# EAGLE board StrBrk (EAGLE 7.5.0)
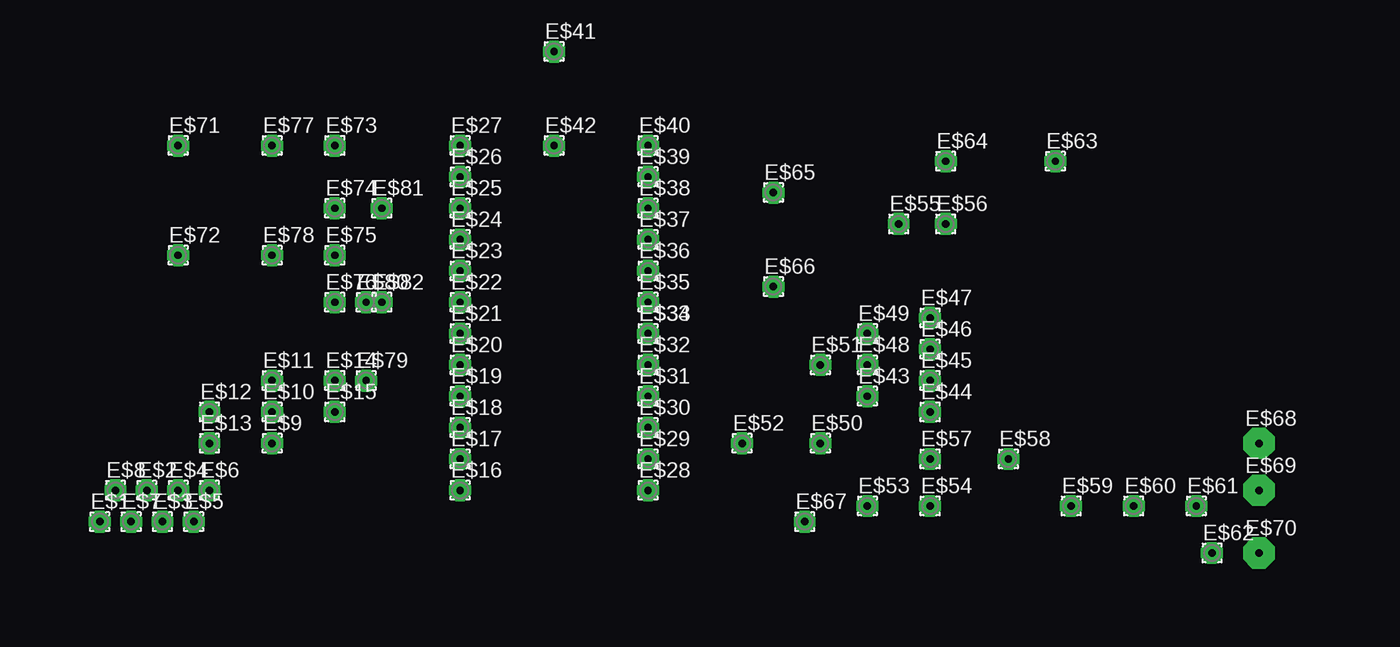
[diagram p0: board, top side]
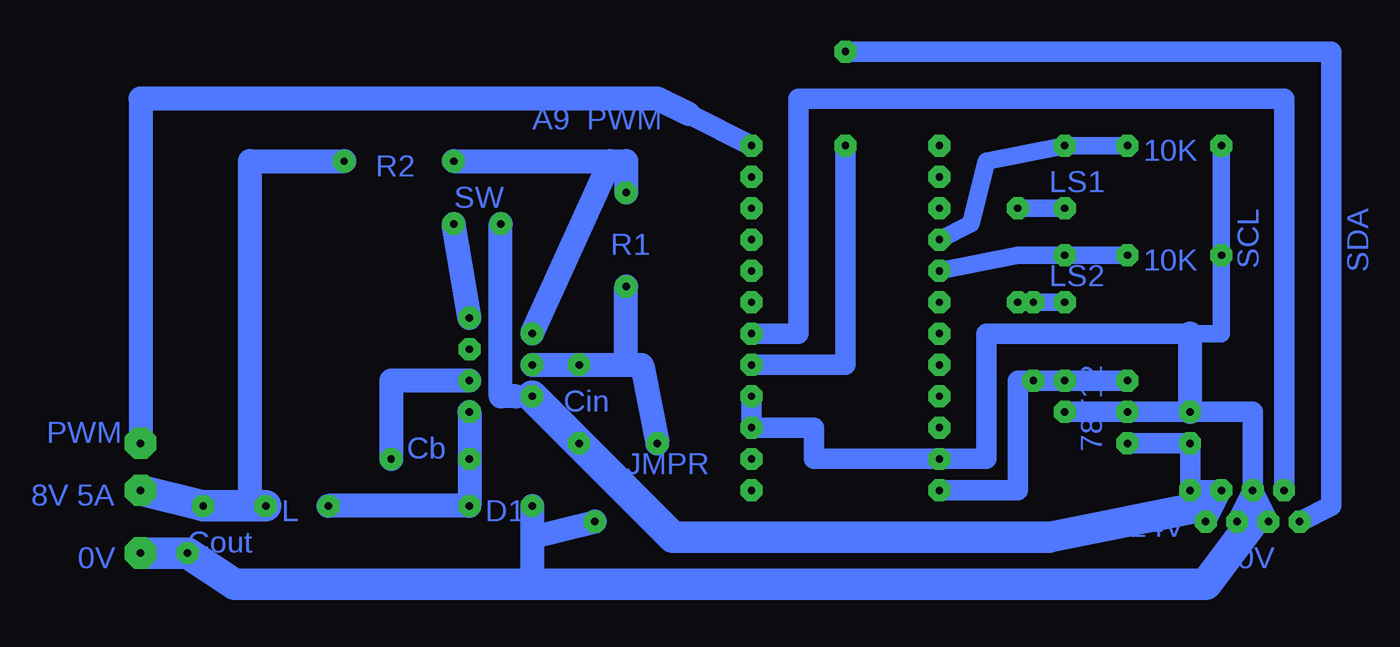
[diagram p1: board, bottom side, seen from below]

No outline drawn. Coordinates in mm, seen from the top.
Copper layers (1*16): Top 0.035mm / dielectric 1.5mm / Bottom 0.035mm
Design rules "default": minimum track width 10mil, minimum drill 24mil, track to track 8mil, track to pad 8mil, pad to pad 8mil, via to via 8mil, smd to smd 8mil, copper to edge 40mil, drill to drill 8mil, minimum pad ring 10mil, minimum via ring 8mil, stop-mask expansion 4mil, vias tented up to drill 0mil, thermal gap 10mil

## Footprints (pad centres in the part's own frame; a part is rotated, then mirrored left to right if it is on the bottom)
1,6/0,8 = drill 0.6 pad 1.778 octagon: 1 0,0
2,15/1,0 = drill 0.6 pad 2.54 octagon: 1 0,0

## Placement (x,y rotation side)
E$1  [1,6/0,8]  7.62,2.54 0 top
E$2  [1,6/0,8]  11.43,5.08 0 top
E$3  [1,6/0,8]  12.7,2.54 0 top
E$4  [1,6/0,8]  13.97,5.08 0 top
E$5  [1,6/0,8]  15.24,2.54 0 top
E$6  [1,6/0,8]  16.51,5.08 0 top
E$7  [1,6/0,8]  10.16,2.54 0 top
E$8  [1,6/0,8]  8.89,5.08 0 top
E$9  [1,6/0,8]  21.59,8.89 0 top
E$10  [1,6/0,8]  21.59,11.43 0 top
E$11  [1,6/0,8]  21.59,13.97 0 top
E$12  [1,6/0,8]  16.51,11.43 0 top
E$13  [1,6/0,8]  16.51,8.89 0 top
E$14  [1,6/0,8]  26.67,13.97 0 top
E$15  [1,6/0,8]  26.67,11.43 0 top
E$16  [1,6/0,8]  36.83,5.08 0 top
E$17  [1,6/0,8]  36.83,7.62 0 top
E$18  [1,6/0,8]  36.83,10.16 0 top
E$19  [1,6/0,8]  36.83,12.7 0 top
E$20  [1,6/0,8]  36.83,15.24 0 top
E$21  [1,6/0,8]  36.83,17.78 0 top
E$22  [1,6/0,8]  36.83,20.32 0 top
E$23  [1,6/0,8]  36.83,22.86 0 top
E$24  [1,6/0,8]  36.83,25.4 0 top
E$25  [1,6/0,8]  36.83,27.94 0 top
E$26  [1,6/0,8]  36.83,30.48 0 top
E$27  [1,6/0,8]  36.83,33.02 0 top
E$28  [1,6/0,8]  52.07,5.08 0 top
E$29  [1,6/0,8]  52.07,7.62 0 top
E$30  [1,6/0,8]  52.07,10.16 0 top
E$31  [1,6/0,8]  52.07,12.7 0 top
E$32  [1,6/0,8]  52.07,15.24 0 top
E$33  [1,6/0,8]  52.07,17.78 0 top
E$34  [1,6/0,8]  52.07,17.78 0 top
E$35  [1,6/0,8]  52.07,20.32 0 top
E$36  [1,6/0,8]  52.07,22.86 0 top
E$37  [1,6/0,8]  52.07,25.4 0 top
E$38  [1,6/0,8]  52.07,27.94 0 top
E$39  [1,6/0,8]  52.07,30.48 0 top
E$40  [1,6/0,8]  52.07,33.02 0 top
E$41  [1,6/0,8]  44.45,40.64 0 top
E$42  [1,6/0,8]  44.45,33.02 0 top
E$43  [1,6/0,8]  69.85,12.7 0 top
E$44  [1,6/0,8]  74.93,11.43 0 top
E$45  [1,6/0,8]  74.93,13.97 0 top
E$46  [1,6/0,8]  74.93,16.51 0 top
E$47  [1,6/0,8]  74.93,19.05 0 top
E$48  [1,6/0,8]  69.85,15.24 0 top
E$49  [1,6/0,8]  69.85,17.78 0 top
E$50  [1,6/0,8]  66.04,8.89 0 top
E$51  [1,6/0,8]  66.04,15.24 0 top
E$52  [1,6/0,8]  59.69,8.89 0 top
E$53  [1,6/0,8]  69.85,3.81 0 top
E$54  [1,6/0,8]  74.93,3.81 0 top
E$55  [1,6/0,8]  72.39,26.67 0 top
E$56  [1,6/0,8]  76.2,26.67 0 top
E$57  [1,6/0,8]  74.93,7.62 0 top
E$58  [1,6/0,8]  81.28,7.62 0 top
E$59  [1,6/0,8]  86.36,3.81 0 top
E$60  [1,6/0,8]  91.44,3.81 0 top
E$61  [1,6/0,8]  96.52,3.81 0 top
E$62  [1,6/0,8]  97.79,0 0 top
E$63  [1,6/0,8]  85.09,31.75 0 top
E$64  [1,6/0,8]  76.2,31.75 0 top
E$65  [1,6/0,8]  62.23,29.21 0 top
E$66  [1,6/0,8]  62.23,21.59 0 top
E$67  [1,6/0,8]  64.77,2.54 0 top
E$68  [2,15/1,0]  101.6,8.89 0 top
E$69  [2,15/1,0]  101.6,5.08 0 top
E$70  [2,15/1,0]  101.6,0 0 top
E$71  [1,6/0,8]  13.97,33.02 0 top
E$72  [1,6/0,8]  13.97,24.13 0 top
E$73  [1,6/0,8]  26.67,33.02 0 top
E$74  [1,6/0,8]  26.67,27.94 0 top
E$75  [1,6/0,8]  26.67,24.13 0 top
E$76  [1,6/0,8]  26.67,20.32 0 top
E$77  [1,6/0,8]  21.59,33.02 0 top
E$78  [1,6/0,8]  21.59,24.13 0 top
E$79  [1,6/0,8]  29.21,13.97 0 top
E$80  [1,6/0,8]  29.21,20.32 0 top
E$81  [1,6/0,8]  30.48,27.94 0 top
E$82  [1,6/0,8]  30.48,20.32 0 top

## Library data of the parts
E$1-E$82 = cls

## Nets
S$1: E$32.1
S$2: E$2.1 E$3.1 E$7.1 E$10.1 E$15.1 E$17.1 E$30.1 E$31.1 E$53.1 E$62.1
S$3: E$4.1 E$5.1 E$6.1 E$9.1 E$13.1
S$4: E$11.1
S$5: E$40.1
S$6: E$8.1 E$33.1
S$7: E$1.1
S$9: E$48.1 E$66.1
S$10: E$44.1
S$12: E$47.1
S$13: E$45.1
S$14: E$60.1 E$61.1
S$16: E$49.1
S$17: E$23.1 E$75.1 E$78.1
S$18: E$24.1 E$73.1 E$77.1
S$19: E$76.1 E$82.1
S$20: E$74.1 E$81.1

## Tracks (layer width: path | path; a pad name or v marks a point on that pad's centre or on a via)
S$1
  Bottom 1.676: 44.45,33.02 44.45,15.24 E$32.1
S$2
  Bottom 1.422: 16.51,17.78 15.24,17.78 13.97,17.78 13.97,33.02
  Bottom 1.676: E$2.1 E$3.1 11.43,2.54 E$7.1 E$2.1 | E$2.1 11.43,11.43 16.51,11.43 E$10.1 E$15.1 | E$31.1 E$30.1 46.99,10.16 46.99,7.62 E$17.1 33.02,7.62 33.02,17.78 16.51,17.78
  Bottom 1.93: E$53.1 69.85,1.27 | 69.85,1.27 69.85,-2.54 | 69.85,1.27 64.77,2.54 | 16.51,11.43 16.51,17.78
  Bottom 2.54: 11.43,2.54 15.24,-2.54 69.85,-2.54 93.98,-2.54 E$62.1 101.6,0
S$3
  Bottom 1.676: E$9.1 E$13.1 E$6.1 | E$6.1 E$5.1 E$4.1 E$6.1
S$4
  Bottom 1.676: E$11.1 30.48,13.97 30.48,5.08 36.83,5.08
S$5
  Bottom 1.676: E$40.1 57.15,35.56
  Bottom 1.93: 57.15,35.56 59.69,36.83 101.6,36.83 101.6,8.89
S$6
  Bottom 1.676: E$8.1 8.89,36.83 48.26,36.83 48.26,17.78 E$33.1
S$7
  Bottom 1.676: E$1.1 5.08,3.81 5.08,40.64 44.45,40.64
S$8
  Bottom 2.54: 15.24,3.81 27.94,1.27 58.42,1.27 69.85,12.7
S$9
  Bottom 1.93: E$48.1 62.23,15.24 | 62.23,15.24 60.96,15.24 59.69,8.89 | 62.23,15.24 E$66.1
S$10
  Bottom 1.93: E$44.1 74.93,3.81 86.36,3.81
S$11
  Bottom 1.93: 71.12,12.7 72.39,12.7 72.39,26.67
S$12
  Bottom 1.93: E$47.1 76.2,26.67
S$13
  Bottom 1.93: E$45.1 81.28,13.97 81.28,7.62
S$14
  Bottom 2.54: E$60.1 E$61.1 101.6,5.08
S$15
  Bottom 1.93: 92.71,5.08 92.71,31.75 85.09,31.75
S$16
  Bottom 1.93: 76.2,31.75 63.5,31.75 | 63.5,31.75 62.23,31.75 62.23,29.21 | E$49.1 63.5,31.75
S$17
  Bottom 1.422: E$23.1 30.48,24.13 E$75.1 E$78.1
S$18
  Bottom 1.422: E$24.1 34.29,26.67 33.02,31.75 E$73.1 E$77.1
S$19
  Bottom 1.422: E$82.1 E$76.1
S$20
  Bottom 1.422: E$81.1 E$74.1

## Text on the board
Bottom: A9 PWM | 10K | R2 | LS1 | SDA | SCL | SW | R1 | 10K | LS2 | 78T12 | Cin | PWM | Cb | JMPR | 8V 5A | D1 | L | +24V | Cout | 0V | 0V